# Allegro board 00_Touch_Display_v1_27032024.brd
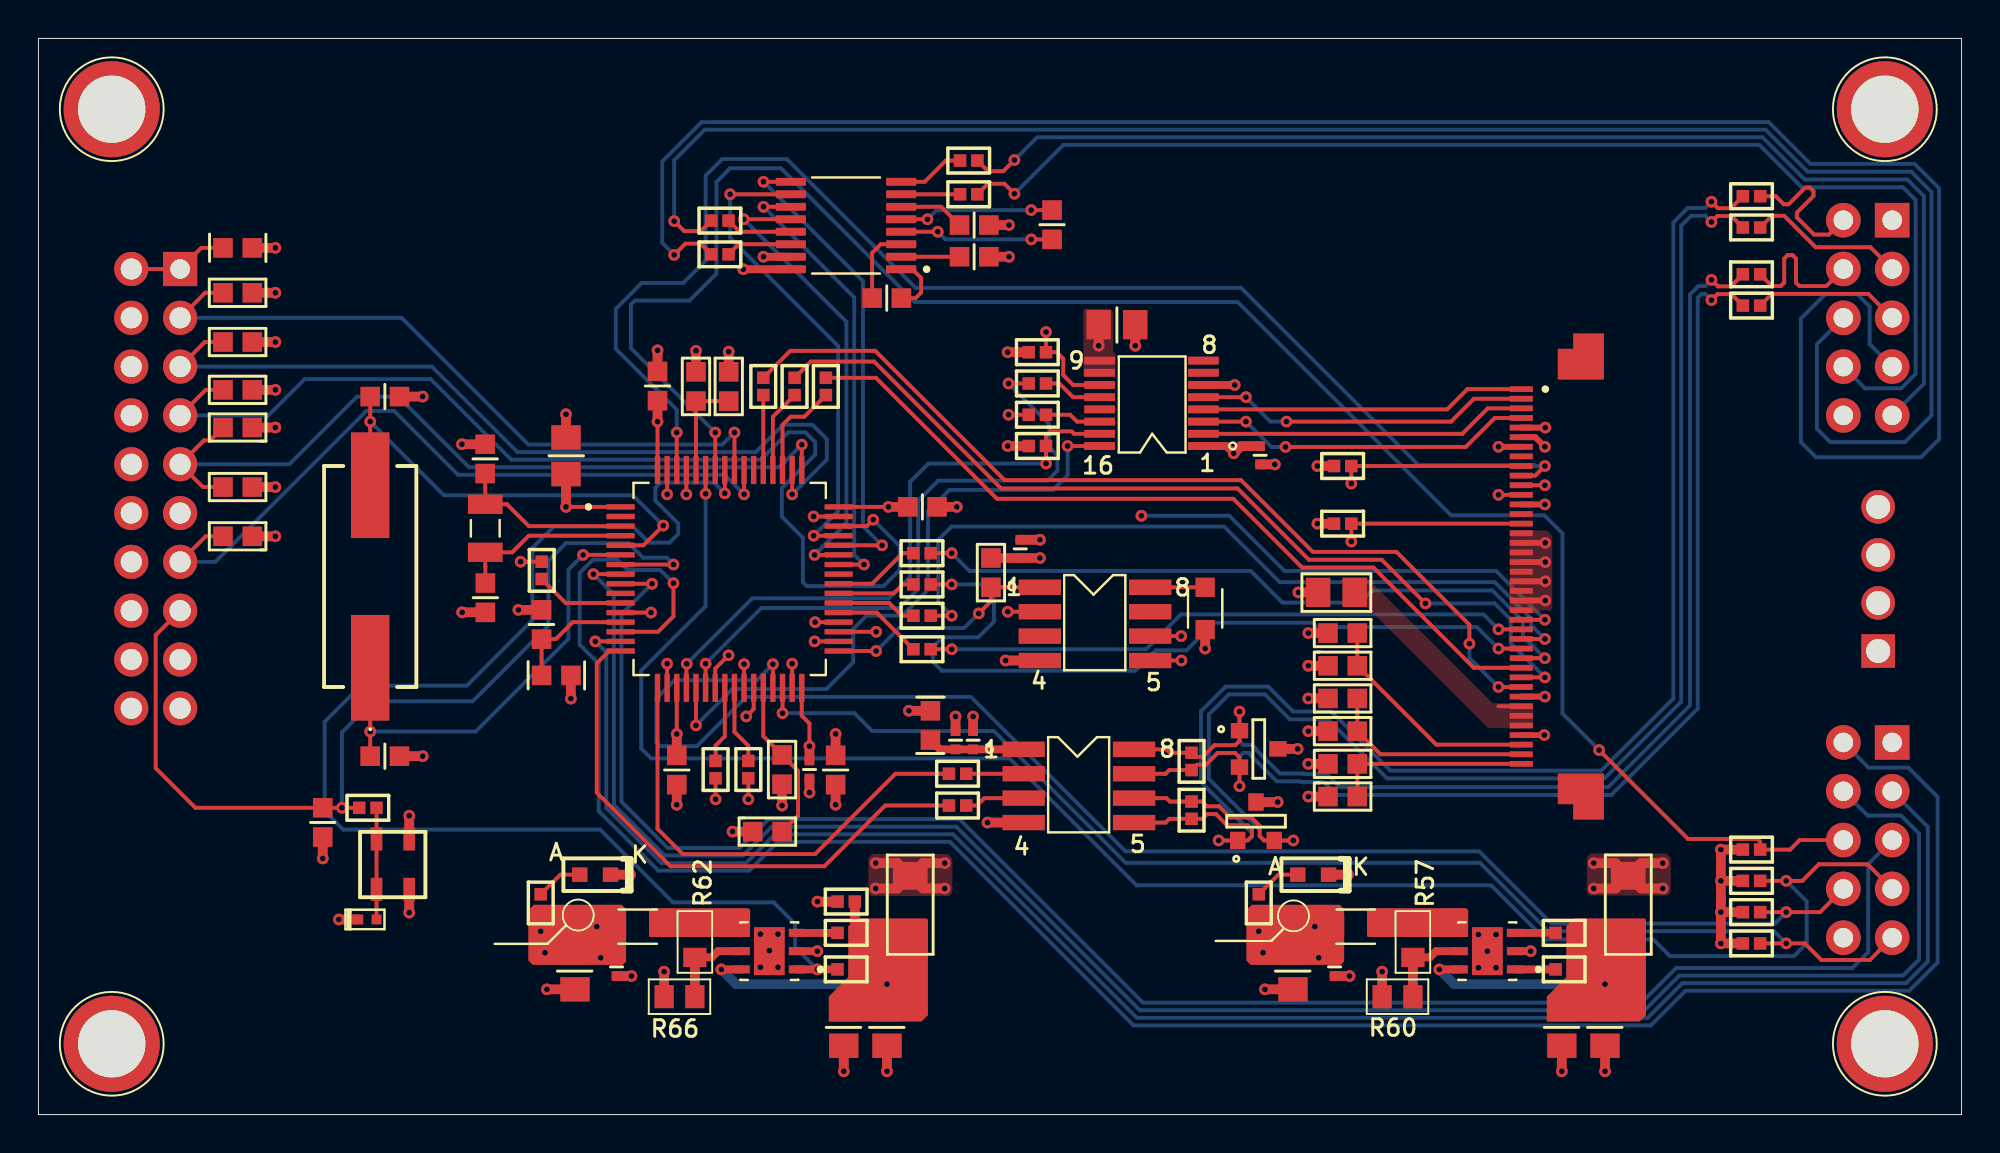
[diagram p0: board, top side]
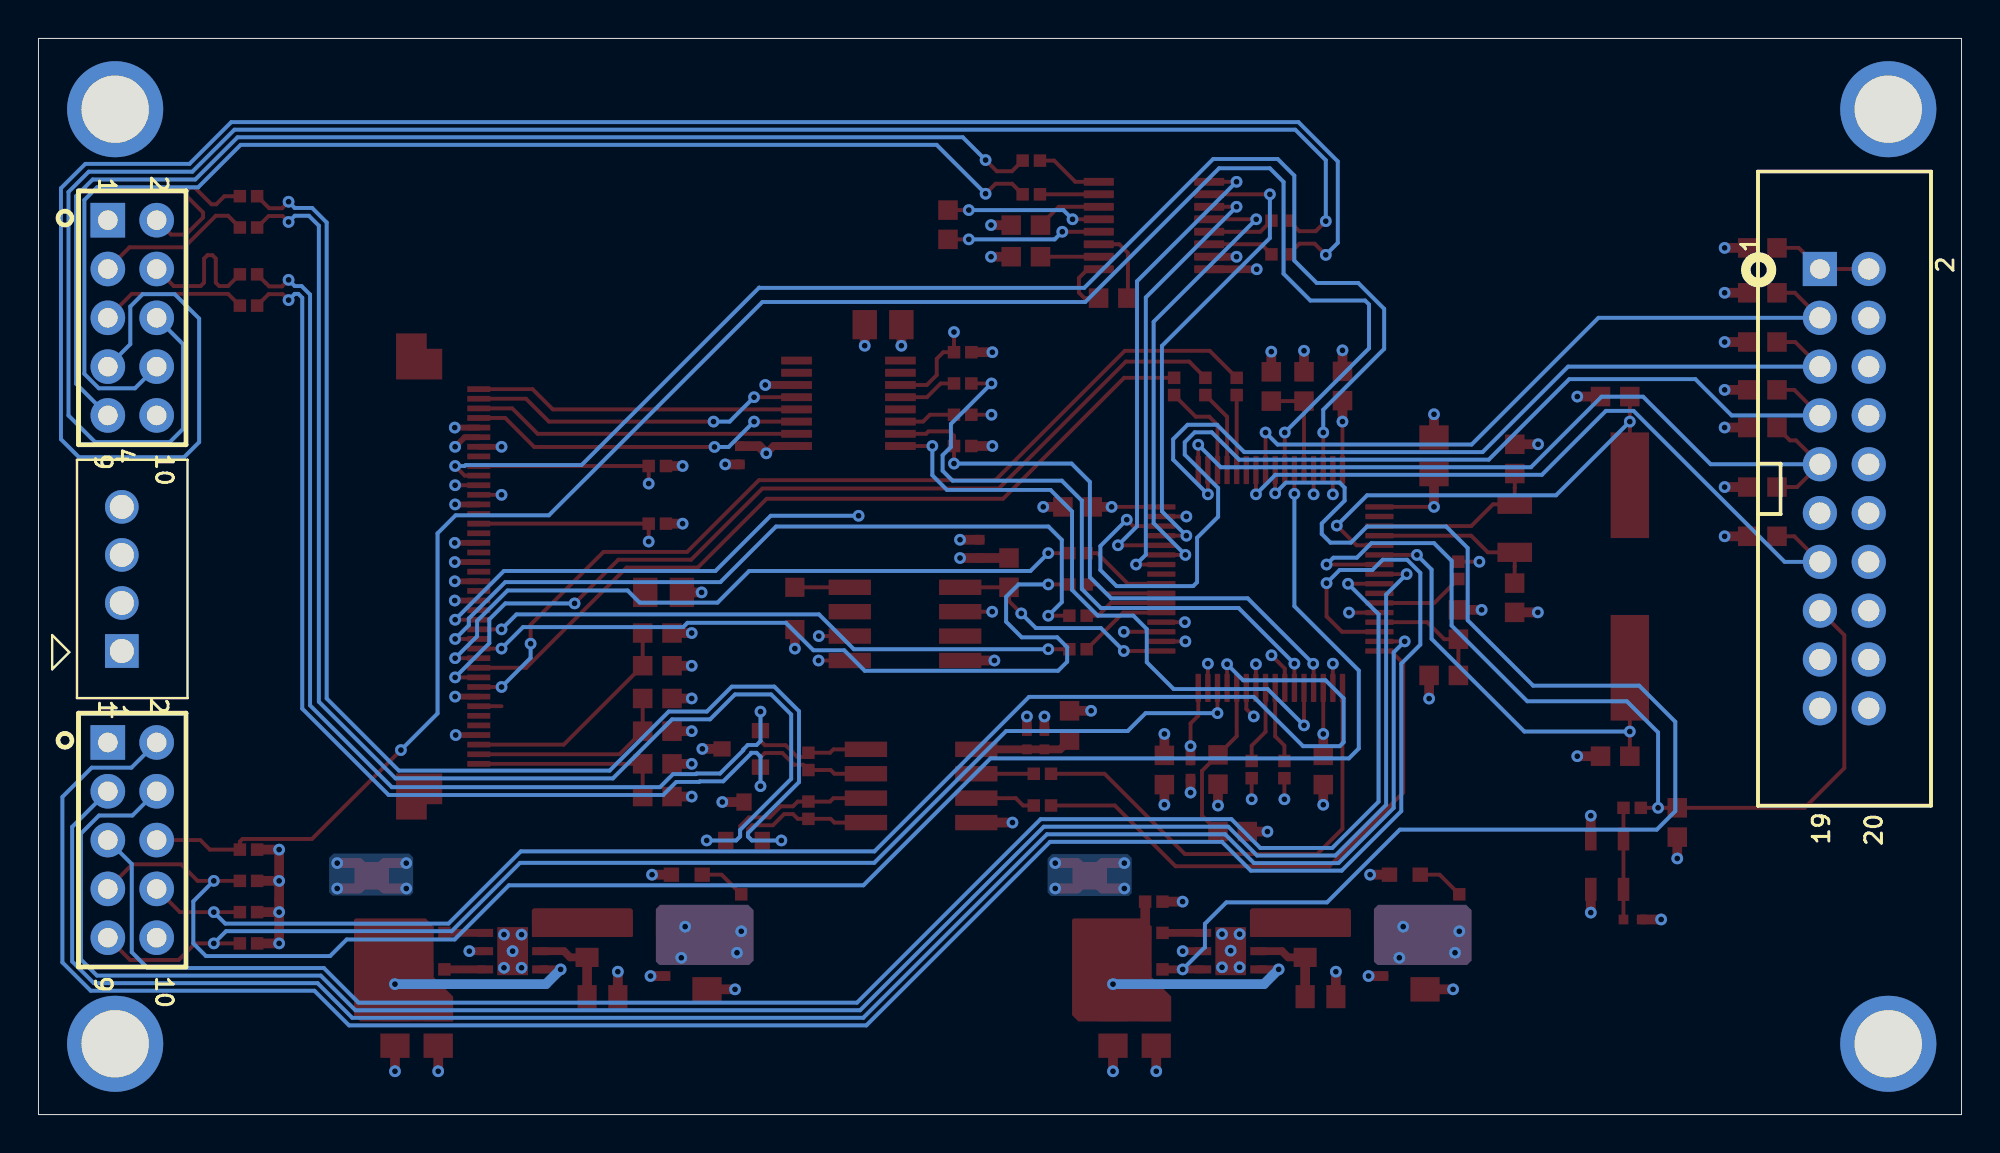
[diagram p1: board, bottom side, seen from below]

Outline 100 x 56 mm; copper layers: TOP, L2 GND, L3 PWR, BOTTOM. Coordinates in mm from the lower left corner of the outline.
Outline path: 0,56 0,0 100,0 100,56 0,56

## Design rules (mm)
constraint set DEFAULT: min track width 0.203
net group DP4: nets N18005580 N18005588
net group DP5: nets N18005548 N18005564
net group RS485_RXI_DATA: nets RS485_RXI_DATA+ RS485_RXI_DATA-
net group RS485_TXO_DATA: nets RS485_TXO_DATA+ RS485_TXO_DATA-

## Placement (name value [footprint] x y rotation side)
C1  0.1uF  [CAP0603]  33.19 17.93 270 top
C2  0.1uF  [CAP0603]  45.97 31.62 0 top
C3  0.1uF  [CAP0603]  32.19 37.91 90 top
C4  0.1uF  [CAP0603]  41.45 17.93 270 top
C5  1uF  [CAP0402]  40.09 17.95 270 top
C6  18pF  [CAP0603]  23.23 34.12 90 top
C7  0.1uF  [CAP0603]  26.16 25.5 90 top
C8  10uF  [CAP0805]  27.43 34.28 90 top
C9  18pF  [CAP0603]  23.24 26.9 270 top
C10  18pF  [CAP0603]  18.01 37.36 0 top
C11  18pF  [CAP0603]  18.01 18.65 0 top
C12  0.1uF  [CAP0603]  14.78 15.2 270 top
C13  0.47uF  [CAP0402]  48.6 19.48 270 top
C14  1uF  [CAP0402]  47.69 19.48 270 top
C15  0.1uF  [CAP0603]  48.66 44.64 0 top
C16  0.1uF  [CAP0603]  44.11 42.49 180 top
C17  0.1uF  [CAP0603]  52.71 46.31 90 top
C18  0.1uF  [CAP0603]  48.66 46.29 0 top
C19  1uF  [CAP0402]  63.53 34.31 270 top
C21  10uF  [CAP0805]  56.08 41.1 0 top
C23  22uF  [CAP0805]  81.46 4.54 270 top
C24  22uF  [CAP0805]  79.21 4.54 270 top
C25  1uF  [CAP0402]  67.4 7.68 270 top
C26  10uF  [CAP0805]  65.24 7.47 270 top
C27  22uF  [CAP0805]  41.88 4.54 270 top
C28  22uF  [CAP0805]  44.12 4.54 270 top
C29  1uF  [CAP0402]  30.06 7.68 270 top
C30  10uF  [CAP0805]  27.9 7.47 270 top
C31  1uF  [CAP0402]  51.06 29.44 90 top
D1  ESD-DIODE  [D0402]  17.1 10.15 0 top
DS1  GREEN  [LED0603]  66.29 12.48 0 top
DS2  GREEN  [LED0603]  28.95 12.48 0 top
F1  Fuse  [FUSE1206]  82.67 10.92 270 top
F2  Fuse  [FUSE1206]  45.33 10.92 270 top
FB1  FB_220  [FB0603]  26.92 22.85 180 top
FB2  FB_220  [FB0603]  10.36 45.1 180 top
FB3  FB_220  [FB0603]  46.38 20.25 270 top
FB4  FB_100  [FB0805]  68.5 9.78 180 top
FB5  FB_100  [FB0805]  31.16 9.78 180 top
FB6  FB_100  [FB0805]  60.67 26.34 270 top
J3  61302021121  [CON_HEADER_M_20POS_2P54_ST]  6.1 32.57 270 bottom
J8  CONN_045P_000C_1  [40POS_FPC_0P5P]  77.11 18.25 270 top
J11  61301011121  [CONN_10POS_2P54_TH_ST]  95.12 14.28 270 bottom
J12  B4B-EH-A  [CON_4POS_2P5P_ST_TH]  95.67 27.87 270 bottom
J13  61301011121  [CONN_10POS_2P54_TH_ST]  95.12 41.46 270 bottom
MH*  -  [unnamed#2]  87.7 54.5 0 top
MH*#2  -  [unnamed#2]  87.7 1.5 0 top
MH*#3  -  [unnamed#2]  12.3 1.5 0 top
MH*#4  -  [unnamed#2]  12.3 54.5 0 top
NOREF  -  [unnamed]  3.81 52.32 0 top
NOREF#2  -  [unnamed]  3.81 3.68 0 top
NOREF#3  -  [unnamed]  96.01 52.32 0 top
NOREF#4  -  [unnamed]  96.01 3.68 0 top
R1  0R  [R0402]  45.94 29.21 0 top
R12  0R  [R0402]  37.69 37.89 90 top
R13  0R  [R0402]  39.32 37.89 90 top
R14  0R  [R0402]  40.95 37.89 90 top
R17  0R  [R0402]  36.91 17.95 270 top
R18  0R  [R0402]  45.94 24.21 0 top
R19  0R  [R0402]  45.94 25.96 0 top
R21  0R  [R0402]  45.94 27.59 0 top
R22  100R  [R0402]  17.13 15.96 180 top
R23  10K  [RES0603]  10.36 30.09 180 top
R24  DNP  [RES0603]  10.36 35.75 180 top
R25  10K  [RES0603]  10.36 37.71 180 top
R26  10K  [RES0603]  10.36 40.2 180 top
R27  10K  [RES0603]  10.36 42.76 180 top
R28  4.7K  [R0402]  89.08 12.16 180 top
R29  4.7K  [R0402]  89.08 13.79 180 top
R30  10K  [RES0603]  10.36 32.66 0 top
R31  0R  [R0402]  89.08 47.79 0 top
R32  0R  [R0402]  89.08 46.16 0 top
R33  100R  [R0402]  59.96 18.38 90 top
R34  0R  [R0402]  89.08 43.72 0 top
R35  0R  [R0402]  89.08 42.1 0 top
R36  0R  [R0402]  47.79 17.74 0 top
R37  0R  [R0402]  47.79 16.08 0 top
R38  100R  [R0402]  59.96 15.84 90 top
R39  0R  [R0402]  35.43 44.77 180 top
R40  0R  [R0402]  48.37 47.89 0 top
R41  0R  [R0402]  35.43 46.52 180 top
R42  0R  [R0402]  48.37 49.64 0 top
R46  0R  [R0402]  51.94 36.42 0 top
R47  4.7K  [R0402]  51.94 34.79 0 top
R48  0R  [R0402]  51.94 38.05 0 top
R49  DNP  [R0402]  67.82 30.75 0 top
R51  4.7K  [R0402]  51.94 39.67 0 top
R56  100K  [R0402]  79.34 7.55 0 top
R57  20.5K  [R0603]  71.47 8.98 90 top
R58  1K  [R0402]  63.46 11.01 270 top
R59  100K  [R0402]  79.34 9.45 0 top
R60  11.8K  [R0603]  70.67 6.14 180 top
R61  100K  [R0402]  42 7.55 0 top
R62  20.5K  [R0603]  34.13 8.98 90 top
R63  1K  [R0402]  26.12 11.01 270 top
R64  100K  [R0402]  42 9.45 0 top
R65  DNP  [R0402]  42 11.08 180 top
R66  11.8K  [R0603]  33.33 6.14 180 top
R67  4.3R  [RES0805]  67.49 27.17 0 top
R68  10K  [RES0603]  67.82 25.06 0 top
R69  DNP  [RES0603]  67.82 23.36 0 top
R70  DNP  [RES0603]  67.82 21.65 0 top
R71  10K  [RES0603]  67.82 19.95 0 top
R72  DNP  [RES0603]  67.82 16.55 0 top
R73  10K  [RES0603]  67.82 18.25 0 top
R74  DNP  [RES0603]  34.19 37.89 270 top
R75  10K  [RES0603]  35.89 37.89 270 top
R76  DNP  [RES0603]  38.67 17.95 90 top
R77  10K  [RES0603]  37.9 14.72 0 top
R78  DNP  [R0402]  67.82 33.75 0 top
R79  10K  [RES0603]  49.53 28.2 270 top
R80  0R  [R0402]  26.17 28.32 90 top
R81  0R  [R0402]  35.21 17.95 270 top
R82  4.7K  [R0402]  89.08 8.91 180 top
R83  4.7K  [R0402]  89.08 10.53 180 top
SW1  SMT_SWITCH  [SW_SPST_SMD_4POS_3P4X3P4MM]  19.28 14.34 180 top
U1  STM32F103RBT6  [LQFP_64POS_0P5P_10X10MM]  35.94 27.87 0 top
U3  SOT_SM712  [SOT23_3]  63.45 19.02 270 top
U4  SN65HVD74DR  [SOIC_8_1P27MM_5X6P2]  51.23 19.01 270 top
U5  SOT_SM712  [SOT23_3]  63.32 15.26 0 top
U6  MAX3232ECPWR  [SOP65P640X120_16N]  41.99 46.26 180 top
U7  XPT2046  [SSOP16_25MIL_157X197]  57.91 36.95 180 top
U8  ST1L05BPUR  [DFN_EP_7POS_0P95MM]  75.34 8.5 180 top
U9  ST1L05BPUR  [DFN_EP_7POS_0P95MM]  38 8.5 180 top
U10  W25Q128FVSIG  [SOIC_8_1P27MM_5X6P2]  52.07 27.44 270 top
VCC_3V3D  VCC_3V3  [TP_50]  65.26 10.34 180 top
VCC_3V3TFT  VCC_3V3TFT  [TP_50]  28.07 10.38 0 top
Y1  32.768KHz  [CRYSTAL_2SMD_2P5P_1P15X2MM]  23.23 30.51 90 top
Y2  8 MHz  [AS1356020SMDTR]  17.25 28 90 top

## Library data of the parts
C1-C4 C7 C15-C18 = C_0.1uF_25V_CER_0603_X7R
C5 C14 C19 C25 C29 C31 = C_1uF_16V_Cer_0402
C6 C9-C11 = C_27pF_50V_CER_0603
C8 C21 C26 C30 = C_10uF_25V_CER_0805
C12 = C_0.1uF_50V_CER_0603
C13 = C_0.47uF_10V_CER_0402
C23 C24 C27 C28 = C_22uF_25V_CER_0805
D1 = DIODE_SUPPRESSOR ESD 30VDC 0402
DS1 DS2 = LED_GREEN_0603
F1 F2 = F_0
FB1-FB6 = FB _220E_0603
J3 = CONN_9
J8 = 502598-4593_0
J11 = CONN_7
J12 = CONN
J13 = CONN_6
R1 R12-R14 R17-R19 R21 R31 R32 R34-R37 R39-R42 R46 R48 R80 R81 = R_0R_0402
R22 R33 R38 R67 = R_100R_0402
R23-R27 R30 R68-R77 R79 = R_10K_0603
R28 R29 R47 R49 R51 R78 R82 R83 = R_4.7K_0402
R56 R59 R61 R64 R65 = R_100K_0402
R57 R62 = R_200K_0603
R58 R63 = R_1K_0402_1%_0.063W
R60 R66 = R_3K_0603
SW1 = TMP_171311
U1 = STM32F103RBT6
U3 U5 = CDSOT23-SM712_1
U4 = SN75179BDR_2
U6 = MAX3232ECPWR_0
U7 = TXS0102DCTR_1
U8 U9 = ST1L05BPUR_1
U10 = W25Q128FVSIG
VCC_3V3D VCC_3V3TFT = T POINT R
Y1 Y2 = Y_CRY_11.0592MHz

## Footprints (pads in the part's own frame, mm; a bottom-side part is the same pattern mirrored in y, then rotated)
40POS_FPC_0P5P
  custom 2.4x2.4 smd: (-21.2,3.1) (1.7,3.1)
  rect 0.3x1.2 smd: 1(-19.5,0) 2(-19,0) 3(-18.5,0) 4(-18,0) 5(-17.5,0) 6(-17,0) 7(-16.5,0) 8(-16,0) 9(-15.5,0) 10(-15,0) 11(-14.5,0) 12(-14,0) 13(-13.5,0) 14(-13,0) 15(-12.5,0) 16(-12,0) 17(-11.5,0) 18(-11,0) 19(-10.5,0) 20(-10,0) 21(-9.5,0) 22(-9,0) 23(-8.5,0) 24(-8,0) 25(-7.5,0) 26(-7,0) 27(-6.5,0) 28(-6,0) 29(-5.5,0) 30(-5,0) 31(-4.5,0) 32(-4,0) 33(-3.5,0) 34(-3,0) 35(-2.5,0) 36(-2,0) 37(-1.5,0) 38(-1,0) 39(-0.5,0) 40(0,0)
AS1356020SMDTR
  rect 5.5x2 smd: 1(-4.75,0) 2(4.75,0)
CAP0402
  rect 0.508x0.508 smd: 1(-0.475,0) 2(0.475,0)
CAP0603
  rect 1.016x1.016 smd: 1(-0.762,0) 2(0.762,0)
CAP0805
  rect 1.27x1.524 smd: 1(-0.953,0) 2(0.953,0)
CON_4POS_2P5P_ST_TH
  rect 1.75x1.75 hole 1.25: 1(3.75,0)
  round 1.75 hole 1.25: 2(1.25,0) 3(-1.25,0) 4(-3.75,0)
CON_HEADER_M_20POS_2P54_ST
  rect 1.778x1.778 hole 1.016: 1(-11.43,-1.27)
  round 1.778 hole 1.1: 2(-11.43,1.27) 3(-8.89,-1.27) 4(-8.89,1.27) 5(-6.35,-1.27) 6(-6.35,1.27) 7(-3.81,-1.27) 8(-3.81,1.27) 9(-1.27,-1.27) 10(-1.27,1.27) 11(1.27,-1.27) 12(1.27,1.27) 13(3.81,-1.27) 14(3.81,1.27) 15(6.35,-1.27) 16(6.35,1.27) 17(8.89,-1.27) 18(8.89,1.27) 19(11.43,-1.27) 20(11.43,1.27)
CONN_10POS_2P54_TH_ST
  rect 1.8x1.8 hole 1.016: 1(-5.08,-1.27)
  round 1.8 hole 1.016: 2(-5.08,1.27) 3(-2.54,-1.27) 4(-2.54,1.27) 5(0,-1.27) 6(0,1.27) 7(2.54,-1.27) 8(2.54,1.27) 9(5.08,-1.27) 10(5.08,1.27)
CRYSTAL_2SMD_2P5P_1P15X2MM
  rect 1x1.8 smd: 1(-1.25,0) 2(1.25,0)
D0402
  rect 0.508x0.508 smd: 1(-0.475,0) 2(0.475,0)
DFN_EP_7POS_0P95MM
  rect 0.84x0.42 smd: 1(-1.435,0.95) 2(-1.435,0) 3(-1.435,-0.95) 4(1.435,-0.95) 5(1.435,0) 6(1.435,0.95)
  rect 1.6x2.5 smd: 7(0,0)
FB0603
  rect 1.016x1.016 smd: 1(-0.762,0) 2(0.762,0)
FB0805
  rect 1x1 smd: 1(-1.1,0) 2(1.1,0)
FUSE1206
  rect 1.448x1.803 smd: 1(-1.5,0) 2(1.5,0)
LED0603
  rect 0.8x0.75 smd: A(-0.8,0) K(0.8,0)
LQFP_64POS_0P5P_10X10MM
  custom 1.47x0.28 smd: 1(-5.67,3.75) 2(-5.67,3.25) 3(-5.67,2.75) 4(-5.67,2.25) 5(-5.67,1.75) 6(-5.67,1.25) 7(-5.67,0.75) 8(-5.67,0.25) 9(-5.67,-0.25) 10(-5.67,-0.75) 11(-5.67,-1.25) 12(-5.67,-1.75) 13(-5.67,-2.25) 14(-5.67,-2.75) 15(-5.67,-3.25) 16(-5.67,-3.75) 33(5.67,-3.75) 34(5.67,-3.25) 35(5.67,-2.75) 36(5.67,-2.25) 37(5.67,-1.75) 38(5.67,-1.25) 39(5.67,-0.75) 40(5.67,-0.25) 41(5.67,0.25) 42(5.67,0.75) 43(5.67,1.25) 44(5.67,1.75) 45(5.67,2.25) 46(5.67,2.75) 47(5.67,3.25) 48(5.67,3.75)
  custom 0.28x1.47 smd: 17(-3.75,-5.67) 18(-3.25,-5.67) 19(-2.75,-5.67) 20(-2.25,-5.67) 21(-1.75,-5.67) 22(-1.25,-5.67) 23(-0.75,-5.67) 24(-0.25,-5.67) 25(0.25,-5.67) 26(0.75,-5.67) 27(1.25,-5.67) 28(1.75,-5.67) 29(2.25,-5.67) 30(2.75,-5.67) 31(3.25,-5.67) 32(3.75,-5.67) 49(3.75,5.67) 50(3.25,5.67) 51(2.75,5.67) 52(2.25,5.67) 53(1.75,5.67) 54(1.25,5.67) 55(0.75,5.67) 56(0.25,5.67) 57(-0.25,5.67) 58(-0.75,5.67) 59(-1.25,5.67) 60(-1.75,5.67) 61(-2.25,5.67) 62(-2.75,5.67) 63(-3.25,5.67) 64(-3.75,5.67)
R0402
  rect 0.65x0.65 smd: 1(-0.45,0) 2(0.45,0)
R0603
  rect 1x1.2 smd: 1(-0.8,0) 2(0.8,0)
RES0603
  rect 1.016x1.016 smd: 1(-0.762,0) 2(0.762,0)
RES0805
  rect 1.27x1.524 smd: 1(-0.953,0) 2(0.953,0)
SOIC_8_1P27MM_5X6P2
  rect 0.8x2.2 smd: 1(0,0) 2(1.27,0) 3(2.54,0) 4(3.81,0) 5(3.81,5.74) 6(2.54,5.74) 7(1.27,5.74) 8(0,5.74)
SOP65P640X120_16N
  custom 1.57x0.41 smd: 1(-2.87,2.275) 2(-2.87,1.625) 3(-2.87,0.975) 4(-2.87,0.325) 5(-2.87,-0.325) 6(-2.87,-0.975) 7(-2.87,-1.625) 8(-2.87,-2.275) 9(2.87,-2.275) 10(2.87,-1.625) 11(2.87,-0.975) 12(2.87,-0.325) 13(2.87,0.325) 14(2.87,0.975) 15(2.87,1.625) 16(2.87,2.275)
SOT23_3
  rect 0.8x0.9 smd: 1(-0.955,-1) 2(0.945,-1) 3(-0.005,1)
SSOP16_25MIL_157X197
  rect 1.6x0.41 smd: 1(-2.667,2.159) 2(-2.667,1.524) 3(-2.667,0.889) 4(-2.667,0.254) 5(-2.667,-0.381) 6(-2.667,-1.016) 7(-2.667,-1.651) 8(-2.667,-2.286) 9(2.733,-2.286) 10(2.733,-1.651) 11(2.733,-1.016) 12(2.733,-0.381) 13(2.733,0.254) 14(2.733,0.889) 15(2.733,1.524) 16(2.733,2.159)
SW_SPST_SMD_4POS_3P4X3P4MM
  rect 0.6x1.2 smd: 1(0,0) 2(0,2.625) 3(1.7,0) 4(1.7,2.625)
TP_50
  round 1 smd: 1(0,0)
unnamed
  round 5 hole 3.5: 1(0,0)
unnamed#2
  round 0 hole 1.016 unplated: (0,0)

## Nets
GND: C1.2 C2.2 C3.2 C4.2 C5.2 C6.2 C7.2 C8.2 C9.2 C10.2 C11.2 C12.2 C13.1 C14.1 C15.2 C18.2 C19.2 C21.2 C23.2 C24.2 C25.2 C26.2 C27.2 C28.2 C29.2 C30.2 C31.2 D1.1 DS1.K DS2.K J3.4 J3.6 J3.8 J3.10 J3.12 J3.14 J3.16 J3.18 J3.20 J8.5 J8.13 J8.16 J8.17 J8.18 J8.19 J8.20 J8.21 J8.22 J8.23 J8.24 J8.37 J11.10 J12.3 J12.4 J13.10 R30.2 R49.1 R60.2 R65.2 R66.2 R67.1 R69.1 R71.1 R73.1 R75.1 R77.1 R78.1 SW1.1 SW1.2 U1.12 U1.18(VSS_4) U1.31 U1.47 U1.63 U3.3 U4.4 U5.3 U6.15 U7.6 U8.2 U8.7 U9.2 U9.7 U10.4
VCC_3V3: C1.1 C2.1 C3.1 C4.1 C5.1 C8.1 C19.1 C21.1 C25.1 C26.1 C31.1 FB1.1 FB2.1 FB3.1 FB4.2 FB6.2 J11.1 J13.1 R23.1 R24.1 R25.1 R26.1 R27.1 R28.2 R29.2 R47.1 R51.1 R58.2 R74.1 R76.1 R79.1 R82.2 R83.2 U1.1 U1.19 U1.32 U1.48 U1.64 U6.16(VCC) U7.1 U7.9 U7.10 VCC_3V3D.1(TP)
VCC_5V: F1.1 F2.1 J12.1 J12.2
VCC_TFT_2V8: C29.1 C30.1 FB5.2 J8.6 J8.7 J8.33 R63.2 R68.1 R70.1 R72.1 VCC_3V3TFT.1(TP)
BL_CTRL: R61.1 U1.57 U9.1
BOOT0: R74.2 R75.2 U1.60
BOOT1: R76.2 R77.2 U1.28
FLSH_CSN: R79.2 U1.33 U10.1
FLSH_MISO: U1.35 U10.2
FLSH_MOSI: U1.36 U10.5
FLSH_SCLK: U1.34 U10.6
I2C1_SCL: J11.6 R29.1 U1.58
I2C1_SDA: J11.7 R28.1 U1.59
I2C2_SCL: J11.8 R83.1 U1.29
I2C2_SDA: J11.9 R82.1 U1.30
IM0: J8.38 R68.2 R69.2
IM1: J8.39 R70.2 R71.2
IM2: J8.40 R72.2 R73.2
JNTRST: J3.3 R27.2 U1.56
JTCK_SWCLK: J3.9 R24.2 R30.1 U1.49
JTDI: J3.5 R26.2 U1.50
JTDO: J3.13 R23.2 U1.55
JTMS_SWDIO: J3.7 R25.2 U1.46
READ_ENABLE: J8.12 R81.2
RS485_RXI_DATA+: R33.2 R34.1 U3.1 U4.8
RS485_RXI_DATA-: R33.1 R35.1 U3.2 U4.7
RS485_TXO_DATA+: R31.1 R38.1 U4.5 U5.1
RS485_TXO_DATA-: R32.1 R38.2 U4.6(Z) U5.2
RS_232_CTS: J13.9 R42.2
RS_232_RTS: J13.8 R40.2
RS_232_RXD: J13.7 R39.2
RS_232_TXD: J13.6 R41.2
RST_L: C12.1 J3.15 R22.2 U1.7
RX_OUT_RS485: R36.1 U1.17
TFT_C_R_SELECT: J8.10 U1.62
TFT_CS_L: J8.9 R78.2 U1.61
TFT_D0: J8.25 R17.2
TFT_D1: J8.26 R18.2
TFT_D2: J8.27 R19.2
TFT_D3: J8.28 R21.2
TFT_D4: J8.29 R1.2
TFT_D5: J8.30 R14.2
TFT_D6: J8.31 R13.2
TFT_D7: J8.32 R12.2
TFT_RST_L: J8.15 R49.2 U1.26
TP_CS: R47.2 U1.20 U7.15(\C\S)
TP_IRQ: R51.2 U1.27 U7.11
TP_MISO: R48.1 U1.22
TP_MOSI: R46.1 U1.23
TP_SCK: U1.21 U7.16
TP_XL: J8.1 U7.4
TP_XR: J8.3 U7.2
TP_YD: J8.4 U7.3
TP_YU: J8.2 U7.5
TTL1_IF: J11.2 U1.14
TTL2_IF: J11.3 U1.15
TTL3_IF: J11.4 U1.8
TTL4_IF: J11.5 U1.9
TX_OUT_RS485: R37.1 U1.16
UART_CTS: U1.44 U6.9
UART_RTS: U1.45 U6.10
UART_RX: U1.43 U6.12
UART_TX: U1.42 U6.11
WRITE_ENABLE: J8.11 R80.2
N17867309: C13.2 C14.2 FB3.2 U4.1
N17867495: R36.2 U4.2
N17867547: R37.2 U4.3
N17894744: C23.1 C24.1 F1.2 R56.2 R59.2 U8.6
N17894751: FB4.1 R57.2 U8.4(VO)
N17894763: R57.1 R60.1 U8.5
N17894769: DS1.A R58.1
N17902599: C15.1 U6.2
N17902635: R39.1 U6.14
N17902659: R40.1 U6.7
N17902683: R41.1 U6.13
N17902703: R42.1 U6.8
N17902725: C16.2 U6.3
N17902727: C16.1 U6.1
N17902741: C17.2 U6.5
N17902743: C17.1 U6.4
N17902757: C18.1 U6.6
N17935079: J8.34 J8.35 J8.36 R67.2
N17993049: C7.1 FB1.2 U1.13
N17993255: C6.1 U1.3 Y1.2
N17993329: C9.1 U1.4 Y1.1
N17993353: C10.1 U1.5 Y2.2
N17993381: C11.1 U1.6 Y2.1
N17993551: R80.1 U1.11
N17993577: R81.1 U1.24
N17993599: R17.1 U1.25
N17993621: R18.1 U1.37
N17993639: R19.1 U1.38
N17993655: R21.1 U1.39
N17993671: R1.1 U1.40
N17993687: R14.1 U1.51
N17993703: R13.1 U1.52
N17993719: R12.1 U1.53
N17994507: D1.2(A2) R22.1 SW1.3 SW1.4
N17994659: FB6.1 U10.8(VCC)
N17996548: FB2.2 J3.1 J3.2
N18005548: J13.2 R31.2
N18005564: J13.3 R32.2
N18005580: J13.4 R34.2
N18005588: J13.5 R35.2
N18006830: C27.1 C28.1 F2.2 R61.2 R64.2 R65.1 U9.6
N18006844: FB5.1 R62.2 U9.4(VO)
N18006920: R62.1 R66.1 U9.5
N18006976: DS2.A R63.1
N178959420: R56.1 U8.1
N178959422: R59.1 U8.3
N179334663: R46.2 U7.14
N179334665: R48.2 U7.12
N180068092: R64.1 U9.3

Pads without a net: J3 11 17 19; J8 8 14; NOREF 1; NOREF#2 1; NOREF#3 1; NOREF#4 1; U1 2 10 41 54; U7 7 8 13; U10 3 7

## Via types
v1: diameter 0.61, hole 0.305, TOP to BOTTOM, 223 vias

## Routing (per net, layer and track width the routed paths; a pad name or vN(x,y) marks a point on that pad's centre or on a via; arc(x,y) is an arc through that point)
GND: length 129.2
  TOP w0.203: U1.31 v1(39.19,23.46) ; U1.12 v1(31.85,26.12) ; U1.47 v1(40.31,31.12) ; U1.18 v1(32.69,23.46) ; U1.63 v1(32.69,32.28)
  TOP w0.305: J8.37 v1(78.3,19.75) ; J8.13 v1(78.33,31.75) ; 77.12,26.75 v1(78.35,26.75) ; J8.5 v1(78.35,35.75) ; 77.12,29.75 v1(78.35,29.75) ; 77.12,28.75 v1(78.35,28.75) ; 77.12,27.75 v1(78.35,27.75)
  TOP w0.406: U7.6 v1(62.2,37.97) ; U9.2 v1(40.5,8.5) ; U8.2 v1(77.59,8.5) ; U6.15 v1(37.7,44.64)
  TOP w0.508: C2.2 v1(47.75,31.62) ; C9.2 v1(22.03,26.13) ; C27.2 v1(41.88,2.25) ; C13.1 v1(48.6,20.71) ; C25.2 v1(68.17,7.21) ; R67.1 v1(65.52,27.17) ; C19.2 v1(64.29,33.83) ; C28.2 v1(44.12,2.25) ; U5.3 v1(64.44,16.26) ; SW1.1 v1(19.28,15.55) ; C10.2 v1(19.98,37.36) ; C14.1 v1(47.69,20.71) ; C1.2 v1(33.19,16.12) ; R65.2 v1(40.5,11.08) ; U3.3 v1(65.48,19.03) ; C23.2 v1(81.46,2.25) ; R69.1 v1(66.03,23.36) ; C6.2 v1(22.02,34.88) ; R73.1 v1(66.03,18.25) ; C12.2 v1(14.78,13.33) ; C24.2 v1(79.21,2.25) ; U4.4 v1(49.35,15.2) ; C30.2 v1(26.44,6.52) ; v1(12.32,32.66) R30.2 ; C7.2 v1(24.95,26.26) ; R60.2 v1(69.87,7.44) ; C21.2 v1(57.03,40.01) ; R66.2 v1(32.53,7.44) ; DS2.K v1(30.76,12.48) ; C31.2 v1(52.08,29.91) ; R71.1 v1(66.03,19.95) ; U10.4 v1(50.29,23.63) ; C15.2 v1(50.47,44.64) ; R75.1 v1(35.89,39.7) ; C11.2 v1(19.98,18.65) ; SW1.2 v1(19.28,10.51) ; R77.1 v1(36.09,14.72) ; R78.1 v1(66.5,33.75) ; C18.2 v1(50.47,46.29) ; C4.2 v1(41.45,16.12) ; C3.2 v1(32.19,39.77) ; C5.2 v1(40.09,16.76) ; D1.1 v1(15.62,10.15) ; C26.2 v1(63.78,6.52) ; C8.2 v1(27.43,36.44) ; DS1.K v1(68.09,12.48) ; R49.1 v1(66.5,30.75) ; C29.2 v1(30.84,7.21)
  L2 GND w0.406: 3.76,21.14 J3.20 ; J3.20 4.83,22.21 ; J3.20 5.89,21.14 ; J3.20 4.83,20.08 ; 3.76,31.3 J3.12 ; J3.12 5.89,31.3 ; J3.12 4.83,30.24 ; J3.12 4.83,32.37 ; 95.67,30.57 J12.4 ; J12.4 94.61,31.62 ; J12.4 95.67,32.68 ; J12.4 96.72,31.62 ; J3.14 4.83,29.83 ; J3.14 4.83,27.7 ; J3.14 3.76,28.76 ; J3.14 5.89,28.76 ; 92.78,36.38 J13.10 ; J13.10 93.85,37.46 ; J13.10 93.85,35.3 ; J13.10 94.93,36.38 ; 4.83,22.62 J3.18 ; J3.18 3.76,23.68 ; J3.18 5.89,23.68 ; J3.18 4.83,24.75 ; J11.10 93.85,10.28 ; J11.10 94.93,9.2 ; J11.10 93.85,8.13 ; J11.10 92.78,9.2 ; J3.16 5.89,26.22 ; J3.16 4.83,27.29 ; J3.16 3.76,26.22 ; J3.16 4.83,25.16 ; J12.3 95.67,30.18 ; J12.3 96.72,29.12 ; J12.3 94.61,29.12 ; J12.3 95.67,28.07 ; J3.8 5.89,36.38 ; J3.8 3.76,36.38 ; J3.8 4.83,35.32 ; J3.8 4.83,37.45 ; J3.10 5.89,33.84 ; J3.10 4.83,34.91 ; J3.10 4.83,32.78 ; J3.10 3.76,33.84 ; J3.4 4.83,42.53 ; J3.4 3.76,41.46 ; J3.4 4.83,40.4 ; J3.4 5.89,41.46 ; J3.6 5.89,38.92 ; J3.6 4.83,37.86 ; J3.6 3.76,38.92 ; J3.6 4.83,39.99
  vias: v1(37.54,9.39) v1(37.54,7.66) v1(38,8.53) v1(38.46,9.39) v1(38.46,7.66) v1(74.88,9.37) v1(74.88,7.64) v1(75.34,8.5) v1(75.79,9.37) v1(75.79,7.64)
VCC_3V3: length 67.1
  TOP w0.203: U1.64 v1(32.19,36.06) ; U1.32 39.69,20.75 40.09,20.35 v1(40.09,19.17) ; U1.19 v1(33.19,19.8) ; U1.1 v1(27.43,31.62) ; U1.48 v1(44.2,31.62)
  TOP w0.406: v1(62.15,34.41) 61.77,34.79 U7.1 ; U6.16 v1(36.65,43.99)
  TOP w0.508: C21.1 v1(55.13,40.01) ; R76.1 v1(38.67,16.08) ; R58.2 v1(63.46,9.54) ; v1(45.26,21.01) FB3.1 ; v1(87.49,12.16) 87.49,11.19 v1(87.49,10.53) ; v1(87.49,12.16) R28.2 ; v1(87.49,12.16) v1(87.49,13.79) R29.2 ; R83.2 v1(87.49,10.53) ; v1(87.49,10.53) 87.49,9.56 v1(87.49,8.91) R82.2 ; C26.1 v1(63.68,8.42) ; C19.1 62.53,34.78 v1(62.15,34.41) ; C5.1 v1(40.09,19.17) ; R47.1 v1(50.4,34.79) ; v1(52.08,28.96) C31.1 R79.1 ; C25.1 v1(66.57,8.16) ; v1(12.32,42.76) R27.1 ; v1(12.32,30.09) R23.1 ; v1(12.32,40.2) R26.1 ; v1(32.19,36.06) C3.1 ; v1(27.43,31.62) C8.1 ; v1(12.32,35.75) R24.1 ; C4.1 v1(41.45,19.8) ; R74.1 v1(34.19,39.75) ; R51.1 v1(50.4,39.67) ; C1.1 v1(33.19,19.8) ; v1(12.32,37.71) R25.1 ; FB1.1 v1(27.69,21.65) ; FB4.2 v1(66.37,9.78) ; v1(12.32,45.1) FB2.1 ; FB6.2 v1(60.67,24.25) ; v1(44.2,31.62) C2.1
  L3 PWR w0.406: J13.1 97.47,46.54 ; J13.1 96.39,45.46 ; J13.1 95.32,46.54 ; J13.1 96.39,47.62 ; 95.32,19.36 J11.1 ; J11.1 96.39,18.29 ; J11.1 96.39,20.44 ; J11.1 97.47,19.36
VCC_5V: length 58.7
  TOP w0.508: v1(47.13,11.76) 45.99,11.76 F2.1 ; F1.1 83.33,11.76 v1(84.47,11.76) ; F1.1 82.01,13.09 v1(80.87,13.09) ; F1.1 82.01,11.76 v1(80.87,11.76) ; F1.1 83.33,13.09 v1(84.47,13.09) ; v1(43.54,11.76) 44.67,11.76 F2.1 ; v1(47.13,13.09) 45.99,13.09 F2.1 ; F2.1 44.67,13.09 v1(43.54,13.09)
  L3 PWR w0.406: 95.67,25.57 J12.2 ; J12.2 94.61,26.62 ; J12.2 95.67,27.68 ; J12.2 96.72,26.62 ; 94.61,24.12 J12.1 ; J12.1 95.67,25.18 ; J12.1 95.67,23.07 ; J12.1 96.72,24.12
  L3 PWR w0.508: v1(47.13,11.76) v1(80.87,11.76)
VCC_TFT_2V8: length 92.1
  TOP w0.305: v1(78.33,34.75) 77.83,35.25 J8.6 ; v1(78.33,21.75) J8.33 ; J8.7 v1(75.92,34.75)
  TOP w0.508: C29.1 v1(29.24,8.16) ; R70.1 v1(66.03,21.65) ; R72.1 v1(66.03,16.55) ; R63.2 v1(26.12,9.54) ; C30.1 v1(26.34,8.42) ; FB5.2 v1(29.04,9.78) ; R68.1 v1(66.03,25.06)
  L3 PWR w0.508: 66.95,22.58 66.95,24.14 v1(66.03,25.06) ; 66.95,22.58 v1(66.03,21.65) 66.72,20.97 66.72,17.23 v1(66.03,16.55) 64.95,15.46 60.53,15.46 59.11,14.04 33.29,14.04 v1(29.04,9.78) ; 66.95,22.58 71.32,22.58 73.94,19.96 76.54,19.96 v1(78.33,21.75) 80.37,23.78 80.37,34.11 79.72,34.75 v1(78.33,34.75) v1(75.92,34.75)
BL_CTRL: length 69.9
  TOP w0.203: U1.57 v1(35.69,32.33)
  TOP w0.406: R61.1 v1(40.5,7.55) U9.1
  BOTTOM w0.203: v1(35.69,32.33) 35.13,32.89 32.34,32.89 32.08,32.62 32.08,31.95 33.27,30.76 33.27,30.21 32.82,29.76 31.75,29.76 30.91,30.6 26.8,30.6 25.68,29.48 25.68,25.72 22.28,22.32 16.76,22.32 14.88,20.44 14.88,15.79 15.85,14.83 29.21,14.83 32.99,11.04 38.23,11.04 39.34,9.92 39.34,8.71 v1(40.5,7.55)
BOOT0: length 5.3
  TOP w0.203: U1.60 R74.2 R75.2
BOOT1: length 8.6
  TOP w0.203: R77.2 39.5,15.56 39.5,17.88 R76.2 37.69,19.69 U1.28
FLSH_CSN: length 12.3
  TOP w0.203: v1(48.9,26.08) 49.53,26.71 R79.2 U10.1 ; 41.61,24.12 v1(43.56,24.12)
  BOTTOM w0.203: v1(43.56,24.12) 44.76,25.32 48.13,25.32 v1(48.9,26.08)
FLSH_MISO: length 10.9
  TOP w0.203: U10.2 v1(50.41,26.17) ; U1.35 v1(43.56,25.12)
  L3 PWR w0.203: v1(43.56,25.12) 49.36,25.12 v1(50.41,26.17)
FLSH_MOSI: length 25.4
  TOP w0.203: U10.5 v1(59.44,23.63) ; U1.36 v1(40.39,25.62)
  L3 PWR w0.203: v1(59.44,23.63) 58.28,22.47 41.48,22.47 39.78,24.17 39.78,25.01 v1(40.39,25.62)
FLSH_SCLK: length 23.4
  TOP w0.203: U1.34 v1(40.36,24.62) ; U10.6 v1(59.42,24.9)
  L3 PWR w0.203: v1(40.36,24.62) 41.95,23.03 57.56,23.03 v1(59.42,24.9)
I2C1_SCL: length 99.8
  TOP w0.203: J11.6 91.58,14.28 91.09,13.79 R29.1 89.53,14.2 89.38,14.34 85.78,14.34 v1(81.15,18.97) ; U1.58 v1(35.19,35.49)
  BOTTOM w0.203: v1(35.19,35.49) 30.81,39.87 30.81,42.16 31.01,42.36 33.86,42.36 35.26,43.76 35.26,48.53 35.97,49.24 38.61,49.24 45.57,42.28 62.36,42.28 73.46,31.18 78.31,31.18 79.25,30.24 79.25,20.87 v1(81.15,18.97)
I2C1_SDA: length 92.7
  TOP w0.203: U1.59 v1(34.69,32.3) ; J11.7 95.11,13.02 92.58,13.02 91.72,12.16 v1(90.88,12.16) R28.1
  BOTTOM w0.203: v1(90.88,12.16) 91.95,11.09 91.95,8.91 91.29,8.25 84.84,8.25 83.97,9.11 78.36,9.11 75.54,11.93 57.1,11.93 50.5,18.53 31.86,18.53 31.34,19.05 31.34,23.11 34.69,26.45 v1(34.69,32.3)
I2C2_SCL: length 80.2
  TOP w0.203: J11.8 92.64,10.53 v1(90.88,10.53) R83.1 ; U1.29 v1(38.19,23.44)
  BOTTOM w0.203: v1(38.19,23.44) 37.35,22.6 33.07,22.6 32.13,21.66 32.13,19.37 32.33,19.17 34.24,19.17 36.8,21.74 48.49,21.74 56.53,13.7 74.92,13.7 78.68,9.94 90.28,9.94 v1(90.88,10.53)
I2C2_SDA: length 66.2
  TOP w0.203: R82.1 v1(90.88,8.91) 91.85,8.91 92.71,8.04 95.23,8.04 J11.9 ; U1.30 v1(38.69,20.89)
  BOTTOM w0.203: v1(38.69,20.89) 42.43,20.89 43.36,19.96 49.68,19.96 56.54,13.1 74.96,13.1 78.51,9.54 90.24,9.54 v1(90.88,8.91)
IM0: length 11.9
  TOP w0.203: R68.2 R69.2 72.69,19.25 J8.38
IM1: length 10.7
  TOP w0.203: R70.2 R71.2 69.78,18.75 J8.39
IM2: length 10.2
  TOP w0.203: J8.40 R73.2 R72.2
JNTRST: length 36.5
  TOP w0.203: U1.56 v1(36.19,35.49) ; R27.2 8.67,42.76 J3.3
  BOTTOM w0.203: v1(36.19,35.49) 35.57,34.87 25.48,34.87 18.88,41.46 J3.3
JTCK_SWCLK: length 42.8
  TOP w0.203: U1.49 v1(39.69,34.86) ; R24.2 8.92,35.08 8.61,35.08 J3.9 8.55,32.66 R30.1
  BOTTOM w0.203: v1(39.69,34.86) 38.52,33.69 22.39,33.69 18.72,37.36 16.56,37.36 13.05,33.84 J3.9
JTDI: length 44
  TOP w0.203: R26.2 8.65,40.2 J3.5 ; U1.50 v1(39.19,32.28)
  BOTTOM w0.203: v1(39.19,32.28) 41,34.08 41,35.15 40.25,35.9 38.72,35.9 37.3,34.47 24.9,34.47 20.46,38.92 J3.5
JTDO: length 38.4
  TOP w0.203: R23.2 8.7,30.09 J3.13 ; U1.55 v1(36.69,32.28)
  BOTTOM w0.203: J3.13 9.2,28.76 17.05,36.62 18.49,36.62 21.82,33.29 35.68,33.29 v1(36.69,32.28)
JTMS_SWDIO: length 58.2
  TOP w0.203: U1.46 43.08,30.62 v1(43.41,30.96) ; R25.2 8.7,37.71 J3.7
  BOTTOM w0.203: J3.7 11.95,36.38 13.84,38.27 20.4,38.27 24.59,34.08 37.57,34.08 38.99,35.5 39.88,35.5 40.39,34.99 40.39,34.34 38.66,32.61 38.66,31.11 39.75,30.02 39.75,27.7 39.95,27.5 43.94,27.5 44.78,28.34 44.78,29.58 v1(43.41,30.96)
READ_ENABLE: length 53.2
  TOP w0.203: J8.12 v1(75.92,32.25) ; R81.2 v1(35.21,16.41)
  L3 PWR w0.203: v1(35.21,16.41) 36.49,15.13 47.8,15.13 48.4,15.73 59.35,15.73 64.07,20.45 64.07,24.82 65.51,26.26 69.88,26.26 75.52,31.9 75.57,31.9 v1(75.92,32.25)
RS485_RXI_DATA+: length 60.1
  TOP w0.203: U4.8 58.66,19.01 58.84,18.83 R33.2 60.18,18.61 60.54,18.61 61.15,19.22 62.23,19.22 62.45,19.45 U3.1 v1(62.45,20.97) ; v1(86.99,43.44) 87.33,43.1 88,43.1 88.18,43.28 R34.1
  BOTTOM w0.203: v1(62.45,20.97) 62.45,19.44 62.66,19.23 63.11,19.23 63.35,18.99 63.35,18.95 64.56,17.75 65.78,17.75 65.81,17.72 67,17.72 67.68,17.04 81.62,17.04 85.88,21.29 85.88,42.67 86.32,43.11 86.67,43.11 v1(86.99,43.44)
RS485_RXI_DATA-: length 60.1
  TOP w0.203: v1(62.45,17.09) U3.2 62.45,18.59 62.23,18.81 61.32,18.81 60.71,18.2 60.24,18.2 R33.1 58.8,17.93 58.61,17.74 U4.7 ; R35.1 88.03,42.69 87.3,42.69 v1(86.99,42.38)
  BOTTOM w0.203: v1(86.99,42.38) 86.67,42.71 86.49,42.71 86.28,42.5 86.28,21.13 81.79,16.63 67.51,16.63 66.83,17.31 65.64,17.31 65.61,17.34 64.39,17.34 62.94,18.79 62.94,18.83 62.66,18.83 62.45,18.62 v1(62.45,17.09)
RS485_TXO_DATA+: length 75.9
  TOP w0.203: R31.1 88,47.16 87.33,47.16 v1(86.99,47.5) ; v1(61.37,14.26) U5.1 62.87,14.26 63.1,14.49 63.1,14.85 62.89,15.06 61.81,15.06 61.23,15.64 60.76,15.64 60.52,15.39 R38.1 58.8,15.39 58.61,15.2 U4.5
  BOTTOM w0.203: v1(61.37,14.26) 62.9,14.26 63.11,14.47 63.11,14.64 60.45,17.3 60.45,20.99 61.73,22.27 63.95,22.27 65.24,20.97 67.22,20.97 70.3,17.9 81.26,17.9 85.01,21.65 85.01,46.42 85.77,47.18 86.67,47.18 v1(86.99,47.5)
RS485_TXO_DATA-: length 75.9
  TOP w0.203: U4.6 58.66,16.47 58.84,16.29 R38.2 60.52,16.29 60.76,16.04 61.4,16.04 61.98,15.46 63.06,15.46 63.5,15.02 63.5,14.49 63.73,14.26 U5.2 v1(65.25,14.26) ; R32.1 88.03,46.76 87.3,46.76 v1(86.99,46.45)
  BOTTOM w0.203: v1(65.25,14.26) 63.72,14.26 63.51,14.47 63.51,14.81 60.86,17.47 60.86,20.82 61.9,21.86 63.78,21.86 65.07,20.57 67.06,20.57 70.13,17.49 81.43,17.49 85.42,21.48 85.42,46.26 85.94,46.77 86.67,46.77 v1(86.99,46.45)
RS_232_CTS: length 63.5
  TOP w0.203: v1(50.75,49.67) 50.17,49.09 49.38,49.09 R42.2
  BOTTOM w0.203: v1(50.75,49.67) 51.93,50.86 89.65,50.86 91.84,48.66 97.18,48.66 98.04,47.8 98.04,38.03 J13.9
RS_232_RTS: length 65.1
  TOP w0.203: v1(50.75,47.92) 50.23,48.44 49.37,48.44 R40.2
  BOTTOM w0.203: v1(50.75,47.92) 53.29,50.46 89.48,50.46 91.69,48.25 96.95,48.25 97.61,47.59 97.61,38.54 96.86,37.79 94.98,37.79 J13.8
RS_232_RXD: length 111.6
  TOP w0.203: R39.2 34.43,45.32 33.64,45.32 v1(33.06,44.74)
  BOTTOM w0.203: J13.7 95.22,40.09 95.22,42.05 94.58,42.69 92.91,42.69 91.64,41.42 91.64,34.99 92.43,34.21 97.89,34.21 98.83,35.15 98.83,48.2 97.56,49.47 92.15,49.47 89.97,51.64 34.48,51.64 32.44,49.6 32.44,45.36 v1(33.06,44.74)
RS_232_TXD: length 97.7
  TOP w0.203: v1(33.06,46.49) 33.58,45.97 34.43,45.97 R41.2
  BOTTOM w0.203: J13.6 92.48,40.09 92.48,35.68 93.17,34.99 97.05,34.99 98.44,36.38 98.44,48.01 97.38,49.07 91.99,49.07 89.81,51.25 34.64,51.25 33.06,49.66 v1(33.06,46.49)
RST_L: length 50.6
  TOP w0.203: J3.15 6.1,24.95 6.1,18.03 8.16,15.96 C12.1 v1(15.78,15.96) R22.2 ; U1.7 v1(33.02,28.62)
  BOTTOM w0.203: v1(33.02,28.62) 32.67,28.98 31.44,28.98 30.68,29.74 27.43,29.74 26.52,28.82 26.52,25.44 22.58,21.51 17.4,21.51 15.78,19.89 v1(15.78,15.96)
RX_OUT_RS485: length 24.8
  TOP w0.203: R36.1 44.56,17.74 40.39,13.56 33.5,13.56 32.19,14.87 U1.17
TFT_C_R_SELECT: length 71.9
  TOP w0.203: v1(78.33,33.75) 77.83,33.25 J8.10 ; U1.62 v1(33.19,35.49)
  BOTTOM w0.203: v1(33.19,35.49) 33.19,36.68 30.02,39.85 30.02,41.93 31.37,43.27 33.53,43.27 34.7,44.44 34.7,48.86 35.56,49.73 38.91,49.73 45.62,43.02 62.51,43.02 62.52,43.03 71.75,33.8 77.78,33.8 77.83,33.75 v1(78.33,33.75)
TFT_CS_L: length 53.9
  TOP w0.203: J8.9 R78.2 v1(68.27,32.84) ; U1.61 v1(33.69,32.28)
  L3 PWR w0.203: v1(68.27,32.84) 68.27,34.68 61.66,41.29 48.51,41.29 40.59,33.37 34.78,33.37 v1(33.69,32.28)
TFT_D0: length 77.3
  TOP w0.203: J8.25 v1(78.33,25.75) ; R17.2 v1(36.91,16.41)
  L3 PWR w0.203: v1(36.91,16.41) 39.14,18.64 48.74,18.64 51.38,21.28 58.85,21.28 65.35,27.78 67.72,27.78 69.36,29.42 69.36,30.51 68.02,31.84 58.04,31.84 v1(57.35,31.16)
  BOTTOM w0.203: v1(78.33,25.75) 75.79,28.29 64.8,28.29 61.92,31.16 v1(57.35,31.16)
TFT_D1: length 31.8
  TOP w0.203: R18.2 v1(47.49,24.21) ; J8.26 v1(75.92,25.25)
  BOTTOM w0.203: v1(75.92,25.25) 75.14,26.03 59.41,26.03 57.6,24.21 v1(47.49,24.21)
TFT_D2: length 41
  TOP w0.203: R19.2 v1(47.49,25.96) ; J8.27 v1(78.33,24.75)
  BOTTOM w0.203: v1(78.33,24.75) 77.62,25.46 77.62,25.81 75.73,27.71 64.54,27.71 61.65,30.6 47.48,30.6 46.79,29.91 46.79,26.66 v1(47.49,25.96)
TFT_D3: length 41.7
  TOP w0.203: J8.28 v1(75.92,24.25) ; R21.2 v1(47.49,27.59)
  BOTTOM w0.203: v1(75.92,24.25) 74.8,25.37 66.48,25.37 66.25,25.59 61.13,25.59 59.7,24.16 58.1,24.16 57.03,23.09 46.98,23.09 46.51,23.56 46.51,24.32 47.02,24.83 48.87,24.83 49.68,25.65 49.68,26.94 49.04,27.59 v1(47.49,27.59)
TFT_D4: length 36.4
  TOP w0.203: R1.2 v1(47.49,29.21) ; J8.29 v1(78.33,23.75)
  BOTTOM w0.203: v1(78.33,23.75) 77.19,24.89 77.19,25.69 75.61,27.27 69.37,27.27 68.73,26.64 64.69,26.64 63.04,28.29 48.42,28.29 v1(47.49,29.21)
TFT_D5: length 42.4
  TOP w0.203: R14.2 43.54,38.34 49.84,32.04 62.13,32.04 65.71,28.47 69.42,28.47 74.63,23.25 J8.30
TFT_D6: length 48.1
  TOP w0.203: J8.31 v1(78.33,22.75) ; R13.2 40.16,39.19 43.45,39.19 50.06,32.58 62.35,32.58 66.06,28.87 69.85,28.87 v1(72.12,26.6)
  BOTTOM w0.203: v1(78.33,22.75) 76.56,24.53 76.56,25.77 75.72,26.6 v1(72.12,26.6)
TFT_D7: length 48.3
  TOP w0.203: R12.2 39.09,39.74 43.51,39.74 50.24,33.01 62.53,33.01 66.27,29.28 70.62,29.28 74.41,25.49 v1(74.41,24.5) ; J8.32 v1(75.92,22.25)
  BOTTOM w0.203: v1(74.41,24.5) 74.41,23.76 v1(75.92,22.25)
TFT_RST_L: length 45.2
  TOP w0.203: U1.26 v1(36.69,23.44) ; J8.15 R49.2 v1(68.27,29.82)
  L3 PWR w0.203: v1(68.27,29.82) 67.42,28.97 64.9,28.97 62.64,26.71 39.97,26.71 v1(36.69,23.44)
TP_CS: length 31.5
  TOP w0.203: U1.20 33.69,23.44 v1(33.71,23.46) ; U7.15 53.85,35.43 53.72,35.55 52.63,35.55 52.39,35.32 R47.2 v1(52.39,33.88)
  BOTTOM w0.203: v1(52.39,33.88) 46.28,33.88 45.33,32.92 45.33,27.97 44.22,26.87 37.12,26.87 v1(33.71,23.46)
TP_IRQ: length 37.4
  TOP w0.203: v1(52.39,40.72) R51.2 52.95,39.67 53.29,39.33 53.29,38.48 53.81,37.97 U7.11 ; v1(36.8,20.72) 37.19,21.11 U1.27
  L3 PWR w0.203: v1(36.8,20.72) 35.72,20.72 35.2,21.24 35.2,23.22 35.22,23.24 35.22,27.41 48.53,40.72 v1(52.39,40.72)
TP_MISO: length 33
  TOP w0.203: R48.1 v1(50.44,38.05) ; U1.22 v1(34.69,23.46)
  BOTTOM w0.203: v1(50.44,38.05) 52.55,35.94 52.55,34.74 52.98,34.31 52.98,33.5 52.47,32.99 46.79,32.99 45.75,31.95 45.75,27.35 44.75,26.36 37.59,26.36 v1(34.69,23.46)
TP_MOSI: length 24.9
  TOP w0.203: U1.23 35.19,23.21 v1(35.88,23.9) ; R46.1 v1(50.44,36.42)
  L3 PWR w0.203: v1(35.88,23.9) 35.88,27.57 44.73,36.42 v1(50.44,36.42)
TP_SCK: length 33.3
  TOP w0.203: U7.16 v1(53.52,34.79) ; U1.21 v1(34.19,20.25)
  BOTTOM w0.203: v1(53.52,34.79) 53.52,33.27 52.76,32.5 47.37,32.5 46.25,31.39 46.25,27.3 44.92,25.96 43.07,25.96 42.37,25.27 42.37,23.54 40.97,22.14 36.08,22.14 v1(34.19,20.25)
TP_XL: length 17
  TOP w0.203: J8.1 74.31,37.75 73.25,36.7 U7.4
TP_XR: length 17.1
  TOP w0.203: J8.3 75.36,36.75 74.04,35.43 U7.2
TP_YD: length 17.7
  TOP w0.203: J8.4 75.73,36.25 74.22,34.74 v1(64.85,34.74) ; U7.3 v1(62.79,36.06)
  BOTTOM w0.203: v1(64.85,34.74) 64.11,34.74 v1(62.79,36.06)
TP_YU: length 17.5
  TOP w0.203: U7.5 v1(62.79,37.33) ; J8.2 74.65,37.25 73.46,36.06 v1(64.9,36.06)
  BOTTOM w0.203: v1(64.9,36.06) 64.06,36.06 v1(62.79,37.33)
TTL1_IF: length 114.8
  TOP w0.203: U1.14 32.22,25.12 33.02,25.93 v1(33.02,27.65)
  BOTTOM w0.203: J11.2 95.17,18.05 97.23,18.05 98.76,16.53 98.76,7.92 97.28,6.44 85.65,6.44 83.85,4.64 56.95,4.64 47.4,14.19 38.46,14.19 36.96,12.69 32.23,12.69 29.13,15.79 29.13,23.46 28.14,24.45 28.14,28.19 28.83,28.87 30.1,28.87 30.63,28.34 32.33,28.34 v1(33.02,27.65)
TTL2_IF: length 95.5
  TOP w0.203: U1.15 v1(28.96,24.62)
  BOTTOM w0.203: v1(28.96,24.62) 29.53,24.05 29.53,15.95 32.4,13.09 36.79,13.09 38.29,14.59 47.56,14.59 57.11,5.03 83.68,5.03 85.49,6.84 97.12,6.84 98.25,7.97 98.25,14.97 J11.3
TTL3_IF: length 99.9
  TOP w0.203: U1.8 v1(28.85,28.12)
  BOTTOM w0.203: J11.4 95.11,15.56 96.85,15.56 97.79,14.62 97.79,8.07 96.96,7.23 85.32,7.23 83.52,5.43 57.27,5.43 47.72,14.98 38.13,14.98 36.63,13.48 32.56,13.48 29.92,16.12 29.92,27.06 v1(28.85,28.12)
TTL4_IF: length 91.5
  TOP w0.203: U1.9 v1(31.9,27.62)
  BOTTOM w0.203: v1(31.9,27.62) 30.31,26.04 30.31,16.28 32.72,13.87 36.47,13.87 37.97,15.37 47.89,15.37 57.44,5.82 83.36,5.82 85.16,7.63 94.32,7.63 95.15,8.45 95.15,13.04 J11.5
TX_OUT_RS485: length 29.4
  TOP w0.203: R37.1 44.03,16.08 40.87,12.92 32.87,12.92 29.03,16.76 29.03,23.48 29.68,24.12 30.27,24.12
UART_CTS: length 25.1
  TOP w0.203: U1.44 v1(43.87,29.62) ; U6.9 v1(37.7,48.54)
  BOTTOM w0.203: v1(37.7,48.54) 42.87,43.37 42.87,30.61 v1(43.87,29.62)
UART_RTS: length 25.1
  TOP w0.203: U6.10 v1(35.97,47.89) ; U1.45 v1(40.31,30.12)
  BOTTOM w0.203: v1(35.97,47.89) 35.97,45.61 41.58,40 41.58,31.39 v1(40.31,30.12)
UART_RX: length 24.1
  TOP w0.203: U6.12 v1(36.68,46.59) ; U1.43 v1(40.36,29.12)
  BOTTOM w0.203: v1(36.68,46.59) 42.01,41.26 42.01,30.77 v1(40.36,29.12)
UART_TX: length 23.5
  TOP w0.203: U6.11 v1(37.7,47.24) ; U1.42 v1(42.93,28.62)
  BOTTOM w0.203: v1(42.93,28.62) 42.42,29.13 42.42,42.52 v1(37.7,47.24)
WRITE_ENABLE: length 65.2
  TOP w0.203: J8.11 v1(78.33,32.75) ; R80.2 v1(25.07,28.77)
  L3 PWR w0.203: v1(78.33,32.75) 77.56,33.52 75.23,33.52 66.34,42.41 41.05,42.41 28.88,30.24 27.81,30.24 26.34,28.77 v1(25.07,28.77)
N17867309: length 5
  TOP w0.406: U4.1 C13.2 C14.2 46.87,19.01 FB3.2
N17867495: length 3
  TOP w0.203: U4.2 R36.2
N17867547: length 3.1
  TOP w0.203: U4.3 49.18,16.47 48.8,16.08 R37.2
N17894744: length 12.6
  TOP w0.406: U8.6 v1(72.85,7.55)
  TOP w0.508: F1.2 82.67,8.13 ; C23.1 v1(81.46,6.79)
  BOTTOM w0.508: v1(72.85,7.55) 73.61,6.79 v1(81.46,6.79)
N17894751: length 2.6
  TOP w0.406: U8.4 72.68,9.45 72.35,9.78 R57.2
N17894763: length 4.6
  TOP w0.406: U8.5 72.68,8.5 72.35,8.18 R57.1
  TOP w0.508: R60.1 R57.1
N17894769: length 2.5
  TOP w0.203: DS1.A 64.48,12.48 R58.1
N17902599: length 3
  TOP w0.203: C15.1 U6.2
N17902635: length 3.5
  TOP w0.203: U6.14 36.41,45.29 R39.1
N17902659: length 3.1
  TOP w0.203: R40.1 U6.7
N17902683: length 3.5
  TOP w0.203: R41.1 36.46,45.94 U6.13
N17902703: length 3.5
  TOP w0.203: U6.8 46.08,48.54 47.19,49.64 R42.1
N17902725: length 4.1
  TOP w0.203: C16.2 43.35,44.84 43.8,45.29 U6.3
N17902727: length 3.1
  TOP w0.203: U6.1 45.44,43.99 45.9,43.53 45.9,42.78 45.61,42.49 C16.1
N17902741: length 8
  TOP w0.203: U6.5 v1(46.23,46.59) ; C17.2 v1(51.62,47.07)
  BOTTOM w0.203: v1(46.23,46.59) 46.71,47.07 v1(51.62,47.07)
N17902743: length 8
  TOP w0.203: C17.1 v1(51.62,45.54) ; U6.4 v1(46.76,45.94)
  BOTTOM w0.203: v1(46.76,45.94) 47.16,45.54 v1(51.62,45.54)
N17902757: length 3.4
  TOP w0.203: U6.6 46.94,47.24 C18.1
N17935079: length 1.2
  TOP w0.203: J8.34 75.92,21.25
N17993049: length 6.4
  TOP w0.203: U1.13 27.78,25.62 26.9,24.74 C7.1 FB1.2
N17993255: length 9.1
  TOP w0.203: U1.3 25.5,30.62 24.36,31.76 Y1.2 23.23,32.62 23.23,32.62 C6.1
N17993329: length 9
  TOP w0.203: C9.1 23.24,28.52 23.23,28.53 Y1.1 24.63,29.26 25.5,30.12 U1.4
N17993353: length 24.7
  TOP w0.203: Y2.2 v1(17.25,36.06) C10.1 ; U1.5 31.46,29.62 v1(32.49,30.65)
  BOTTOM w0.203: v1(17.25,36.06) 21.09,32.23 30.91,32.23 v1(32.49,30.65)
N17993381: length 23.5
  TOP w0.203: U1.6 v1(28.32,29.12) ; Y2.1 v1(17.25,19.93) C11.1
  BOTTOM w0.203: v1(17.25,19.93) 22.73,19.93 27.56,24.76 27.56,28.36 v1(28.32,29.12)
N17993551: length 4.6
  TOP w0.203: R80.1 27.41,26.62 U1.11
N17993577: length 4
  TOP w0.203: U1.24 35.69,19.68 35.21,19.2 R81.1
N17993599: length 4.1
  TOP w0.203: R17.1 36.91,19.2 36.19,19.92 U1.25
N17993621: length 4.7
  TOP w0.203: R18.1 43.92,25.79 43.92,25.8 43.59,26.12 U1.37
N17993639: length 4.2
  TOP w0.203: U1.38 44.24,26.62 44.9,25.96 R19.1
N17993655: length 4.1
  TOP w0.203: U1.39 44.48,27.12 44.94,27.59 R21.1
N17993671: length 4.5
  TOP w0.203: R1.1 44.94,29.21 43.35,27.62 U1.40
N17993687: length 5.2
  TOP w0.203: U1.51 38.69,35.89 39.12,36.31 39.82,36.31 R14.1
N17993703: length 4.4
  TOP w0.203: R13.1 38.19,36.31 U1.52
N17993719: length 3.9
  TOP w0.203: R12.1 U1.53
N17994507: length 5.8
  TOP w0.203: D1.2 SW1.4 SW1.3 R22.1
N17994659: length 2.9
  TOP w0.203: U10.8 FB6.1
N17996548: length 5.2
  TOP w0.203: J3.2 J3.1 8.46,45.1 FB2.2
N18005548: length 8.2
  TOP w0.203: R31.2 90.33,47.79 90.75,47.37 91.01,47.37 91.87,48.23 92.12,48.23 92.3,48.05 92.3,47.8 91.44,46.94 91.44,46.69 92.33,45.79 93.11,45.79 J13.2
N18005564: length 8.3
  TOP w0.203: J13.3 95.26,45.13 92.42,45.13 90.78,46.77 90.14,46.77 R32.2
N18005580: length 7.7
  TOP w0.203: R34.2 90.14,43.11 90.6,43.11 90.78,43.29 90.78,44.54 90.96,44.72 91.21,44.72 91.39,44.54 91.39,43.29 91.57,43.11 92.97,43.11 J13.4
N18005588: length 7.6
  TOP w0.203: J13.5 95.15,42.71 90.14,42.71 R35.2
N18006830: length 14.2
  TOP w0.406: U9.6 v1(35.51,7.55)
  TOP w0.508: F2.2 45.33,8.13 ; C28.1 v1(44.12,6.79) ; R64.2 R65.1
  BOTTOM w0.508: v1(44.12,6.79) 36.28,6.79 v1(35.51,7.55)
N18006844: length 2.6
  TOP w0.406: R62.2 35.01,9.78 35.34,9.45 U9.4
N18006920: length 4.6
  TOP w0.406: U9.5 35.34,8.5 35.01,8.18 R62.1
  TOP w0.508: R66.1 R62.1
N18006976: length 2.5
  TOP w0.203: R63.1 27.14,12.48 DS2.A
N178959420: length 2.1
  TOP w0.406: R56.1 U8.1
N178959422: length 2.1
  TOP w0.406: R59.1 U8.3
N179334663: length 2.9
  TOP w0.203: U7.14 54,36.06 53.64,36.42 R46.2
N179334665: length 3.1
  TOP w0.203: U7.12 53.8,37.33 53.08,38.05 R48.2
N180068092: length 2.1
  TOP w0.406: R64.1 U9.3

## Copper pours and planes (outline as drawn; the poured copper is in the pictures)
GND on TOP: 78.44,30.4 76.56,30.4 76.53,30.37 76.53,26.15 76.58,26.1 78.49,26.1 78.71,26.33 78.71,30.12
GND on L2 GND: 0.76,0.76 0.76,55.24 99.24,55.24 99.24,0.76
VCC_3V3 on TOP (solid shape): 67.89,10.69 67.89,7.97 67.72,7.79 63.04,7.79 62.81,8.02 62.81,10.64 63.09,10.91 67.67,10.91
VCC_3V3 on TOP: 55.98,38.4 54.38,38.4 54.33,38.45 54.33,41.85 54.41,41.93 55.73,41.93 55.88,41.78 55.88,39.72 56.01,39.59 56.01,38.42
VCC_3V3 on BOTTOM: 63.09,10.91 67.67,10.91 67.89,10.69 67.89,7.97 67.72,7.79 63.04,7.79 62.81,8.02 62.81,10.64
VCC_3V3 on L3 PWR: 0.76,0.76 0.76,55.24 99.24,55.24 99.24,0.76 ; 1 cut-out
VCC_5V on TOP, BOTTOM: 47.35,11.37 43.31,11.37 43.15,11.52 43.15,13.35 43.36,13.56 47.29,13.56 47.52,13.33 47.52,11.55
VCC_5V on TOP, BOTTOM: 84.71,11.4 80.67,11.4 80.52,11.55 80.52,13.38 80.72,13.58 84.66,13.58 84.89,13.35 84.89,11.58
VCC_5V on L3 PWR: 43.18,13.4 90.22,13.4 91.14,14.32 91.14,27.27 91.8,27.93 96.55,27.93 97.33,27.15 97.33,23.13 96.88,22.68 94.34,22.68 92.13,20.47 92.13,12.57 90.68,11.12 43.15,11.12 42.98,11.3 42.98,13.2
VCC_TFT_2V8 on TOP (solid shape): 30.56,10.69 30.56,7.97 30.38,7.79 25.7,7.79 25.48,8.02 25.48,10.64 25.76,10.91 30.33,10.91
VCC_TFT_2V8 on BOTTOM: 25.76,10.91 30.33,10.91 30.56,10.69 30.56,7.97 30.38,7.79 25.7,7.79 25.48,8.02 25.48,10.64
(no net) on TOP: 83.52,10.2 79.86,10.2 79.45,9.8 79.45,7.16 78.44,6.14 78.44,4.87 78.46,4.84 83.26,4.84 83.59,5.17 83.59,10.13
(no net) on TOP: 36.96,9.24 31.8,9.24 31.75,9.29 31.75,10.64 31.85,10.74 36.91,10.74 37.01,10.64 37.01,9.29
(no net) on TOP: 46.18,10.2 42.52,10.2 42.11,9.8 42.11,7.16 41.1,6.14 41.1,4.87 41.12,4.84 45.92,4.84 46.25,5.17 46.25,10.13
(no net) on TOP: 25.76,10.91 30.33,10.91 30.56,10.69 30.56,7.97 30.38,7.79 25.7,7.79 25.48,8.02 25.48,10.64
(no net) on TOP: 74.3,9.24 69.14,9.24 69.09,9.29 69.09,10.64 69.19,10.74 74.24,10.74 74.35,10.64 74.35,9.29
(no net) on TOP: 63.09,10.91 67.67,10.91 67.89,10.69 67.89,7.97 67.72,7.79 63.04,7.79 62.81,8.02 62.81,10.64
N17894744 on TOP (solid shape): 83.59,10.13 83.59,5.17 83.26,4.84 78.46,4.84 78.44,4.87 78.44,6.14 79.45,7.16 79.45,9.8 79.86,10.2 83.52,10.2
N17894751 on TOP (solid shape): 74.35,10.64 74.35,9.8 74.34,9.75 74.34,9.28 74.3,9.24 69.14,9.24 69.09,9.29 69.09,10.64 69.19,10.74 74.24,10.74
N17935079 on TOP: 77.72,21.41 75.62,21.41 69.09,27.93 67.84,27.93 67.82,27.91 67.82,26.46 67.87,26.41 69.09,26.41 75.39,20.11 77.7,20.11 77.72,20.14
N18006830 on TOP (solid shape): 46.25,10.13 46.25,5.17 45.92,4.84 41.12,4.84 41.1,4.87 41.1,6.14 42.11,7.16 42.11,9.8 42.52,10.2 46.18,10.2
N18006844 on TOP (solid shape): 37.01,10.64 37.01,9.8 37,9.75 37,9.28 36.96,9.24 31.8,9.24 31.75,9.29 31.75,10.64 31.85,10.74 36.91,10.74

## Text on the board
User.5: FIGURE | FINISHED_SIZE | 12.01 | 40.0 | 43.311 | 49.209 | 137.795 | DRILL CHART: TOP to BOTTOM | ALL UNITS ARE IN MILS | TOLERANCE_DRILL | +0.0/-0.0 | +2.988/-2.988 | PLATED | NON-PLATED | QTY | 223 | 1 | 20 | 19 | 4
